# Altium PCB ip-mic-cat.PcbDoc (part 2 of 2)
Units mm, origin at the board's own origin, x right, y up, seen from the top; angles counter-clockwise.
Board outline 152.4 x 101.6 mm, 2 copper layers (Top Layer, Bottom Layer); 79 components, 63 nets, 296 pads, 99 vias.
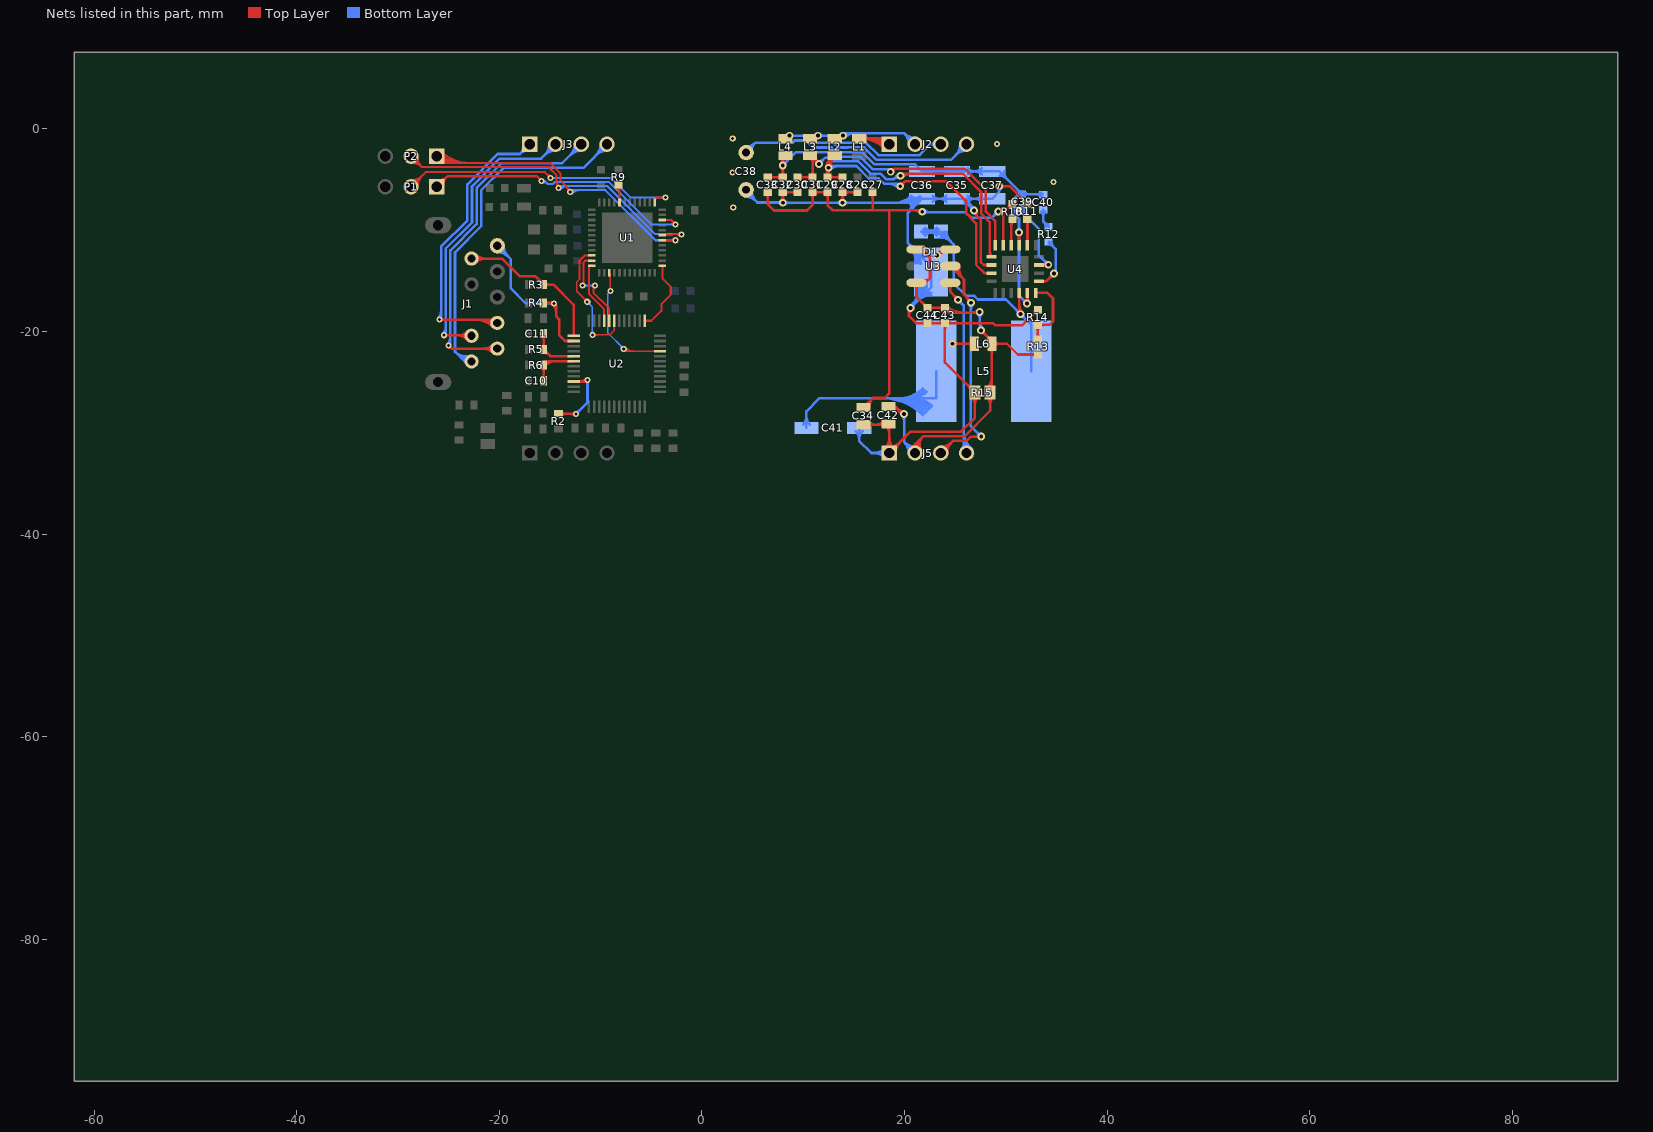
[diagram p2: the nets of this part, all layers, seen from the top]

## Via types
v1: diameter 0.6, hole 0.3, Top Layer to Bottom Layer, 70 vias
v2: diameter 0.762, hole 0.381, Top Layer to Bottom Layer, 29 vias

## Nets (pads, with @x,y where several pads share a name; then routed paths per layer and width w, separated by ;. In a path a pad name is that pad's centre, name@x,y a point inside that pad or via, vN(x,y) a via of type N, cw(c..) or ccw(c..) an arc to the next point about the centre after c; other vN are vias at no path point) (continued)
NetC26_2: C26.2 C28.2 C30.2 C32.2 C34.2 C35.2 C36.2 C37.2 C38.1 C41.1 C42.2 C43.2 C44.2 D1.2 J5.1 R11.2 R14.1 R15.1 U3.6 U4.12 | length 199.5
  Top Layer w0.254: C32.2@7.801,-6.435 cw(c7.378,-6.858) 7.976,-6.858 cw(c8.575,-6.858) C32.2@8.152,-6.435 ; v2@7.815,-7.108 ccw(c7.425,-6.718) 7.976,-6.718 ; C32.2@7.976,-6.63 ccw(c8.651,-6.63) v2@8.174,-7.108 ; v2(7.994,-7.287) 7.976,-7.269 C32.2@7.976,-6.259 C30.2@9.457,-6.259 ; C32.2@8.177,-6.435 cw(c8.6,-6.858) 8.6,-6.259 cw(c8.6,-5.66) C32.2@8.177,-6.084 ; C30.2@9.256,-6.435 ccw(c8.833,-6.858) 8.833,-6.259 ccw(c8.833,-5.66) C30.2@9.256,-6.084 ; v2@13.708,-7.108 ccw(c13.248,-6.648) 13.898,-6.648 ; C28.2@13.723,-6.435 cw(c13.299,-6.858) 13.898,-6.858 cw(c14.497,-6.858) C28.2@14.073,-6.435 ; v2(13.887,-7.287) 13.898,-7.276 C28.2@13.898,-6.259 C26.2@15.379,-6.259 ; 13.898,-6.7 ccw(c14.474,-6.7) v2@14.067,-7.108 ; C28.2@14.098,-6.435 cw(c14.522,-6.858) 14.522,-6.259 cw(c14.522,-5.66) C28.2@14.098,-6.084 ; C26.2@15.178,-6.435 ccw(c14.755,-6.858) 14.755,-6.259 ccw(c14.755,-5.66) C26.2@15.178,-6.084 ; C34.2@15.945,-29.194 18.332,-29.194 C42.2@18.408,-29.118 18.51,-29.219 J5.1@18.51,-32 20.617,-29.893 25.597,-29.893 26.955,-28.535 R15.1@26.955,-26.035 23.996,-23.077 C43.2@23.996,-19.165 ; C34.2@16.423,-29.422 cw(c16.974,-29.974) 16.974,-29.194 cw(c16.974,-28.414) C34.2@16.423,-28.965 ; 17.195,-29.194 ccw(c17.195,-28.154) C42.2@17.93,-28.889 ; 17.563,-29.194 cw(c17.563,-29.713) C42.2@17.93,-29.346 ; J5.1@18.061,-31.551 ccw(c16.977,-30.467) 18.51,-30.467 ccw(c20.043,-30.467) J5.1@18.959,-31.551 ; C42.2@18.18,-29.346 cw(c17.383,-30.143) 18.51,-30.143 ; J5.1@18.241,-31.731 ccw(c17.59,-31.08) 18.51,-31.08 ccw(c19.43,-31.08) J5.1@18.779,-31.731 ; J5.1@18.51,-31.619 ccw(c18.51,-30.699) 19.16,-31.35 ccw(c19.811,-32) J5.1@18.891,-32 ; J5.1@18.51,-31.365 ccw(c18.51,-29.832) 19.594,-30.916 ccw(c20.678,-32) J5.1@19.145,-32 ; 18.51,-29.652 cw(c18.943,-29.652) C42.2@18.637,-29.346 ; 20.44,-18.478 cw(c21.181,-18.478) v2@20.743,-17.881 ; v2(20.593,-17.676) 20.44,-17.828 20.44,-18.463 21.142,-19.165 C44.2@22.269,-19.165 C43.2@23.996,-19.165 ; C44.2@22.069,-19.34 ccw(c21.645,-19.764) 21.645,-19.165 ccw(c21.645,-18.566) C44.2@22.069,-18.99 ; C44.2@22.47,-19.34 cw(c22.893,-19.764) 22.893,-19.165 cw(c22.893,-18.566) C44.2@22.47,-18.99 ; v2@23.186,-12.241 ccw(c23.13,-11.621) U3.6@23.669,-11.933 ; v2(23.209,-12.494) 23.817,-11.886 U3.6@24.522,-11.886 ; v2@23.209,-12.24 ccw(c23.209,-11.627) 23.643,-12.061 ccw(c24.076,-12.494) v2@23.463,-12.494 ; v2@23.264,-12.246 ccw(c23.324,-11.977) 23.564,-12.115 ; v2@23.275,-12.249 ccw(c23.411,-11.739) U3.6@23.675,-12.196 ; v2@23.277,-12.426 cw(c23.922,-13.071) U3.6@23.922,-12.159 ; v2@23.46,-12.532 cw(c23.942,-12.605) U3.6@23.698,-12.183 ; 23.53,-12.173 ccw(c23.242,-11.886) U3.6@23.649,-11.886 ; C43.2@23.796,-19.34 ccw(c23.373,-19.764) 23.373,-19.165 ccw(c23.373,-18.566) C43.2@23.796,-18.99 ; C43.2@23.821,-19.34 cw(c23.398,-19.764) 23.996,-19.764 cw(c24.595,-19.764) C43.2@24.172,-19.34 ; C43.2@24.197,-19.34 cw(c24.62,-19.764) 24.62,-19.165 cw(c24.62,-18.566) C43.2@24.197,-18.99 ; 25.977,-25.057 ccw(c26.955,-24.079) R15.1@26.955,-25.462 ; 26.339,-25.419 cw(c25.873,-25.885) R15.1@26.532,-25.885 ; R15.1@26.41,-25.49 ccw(c26.955,-24.946) R15.1@26.955,-25.716 ; R15.1@26.656,-26.484 cw(c25.934,-27.206) 26.955,-27.206 cw(c27.976,-27.206) R15.1@27.254,-26.484 ; v2@26.844,-8.302 cw(c26.817,-8.605) 27.121,-8.605 ; v2(26.867,-8.049) 26.994,-8.049 27.121,-8.176 27.121,-8.543 27.527,-8.949 27.527,-13.132 27.827,-13.432 U4.12@28.595,-13.432 ; v2(29.356,-5.662) 30.399,-5.662 R11.2@32.124,-7.387 ; v2@29.535,-5.841 cw(c29.969,-6.275) 29.969,-5.662 cw(c29.969,-5.048) v2@29.535,-5.482 ; 31.658,-6.921 cw(c31.192,-7.387) R11.2@31.851,-7.387 ; 31.719,-6.982 ccw(c32.099,-6.601) R11.2@32.099,-7.139 ; 32.7,-18.32 ccw(c32.234,-17.854) R14.1@32.893,-17.854 ; 32.76,-18.259 cw(c33.141,-18.64) R14.1@33.141,-18.102 ; R14.1@33.166,-17.854 31.642,-19.378 28.949,-19.378 28.737,-19.165 C43.2@23.996,-19.165
  Bottom Layer w0.254: C38.1@4.261,-6.68 cw(c4.261,-8.213) 5.345,-7.129 cw(c6.429,-6.045) C38.1@4.896,-6.045 ; C38.1@4.261,-6.426 cw(c4.261,-7.346) 4.911,-6.696 cw(c5.561,-6.045) C38.1@4.642,-6.045 ; C38.1@4.261,-6.045 5.477,-7.262 v2@7.994,-7.262 ; 7.32,-7.262 cw(c7.32,-7.962) v2@7.815,-7.467 ; 7.443,-7.262 ccw(c7.443,-6.735) v2@7.815,-7.108 ; v2(7.994,-7.287) v2(13.887,-7.287) C36.2@21.336,-7.287 ; v2@8.174,-7.467 cw(c8.608,-7.9) 8.608,-7.287 cw(c8.608,-6.674) v2@8.174,-7.108 ; v2@13.708,-7.467 ccw(c13.274,-7.9) 13.274,-7.287 ccw(c13.274,-6.674) v2@13.708,-7.108 ; v2@14.067,-7.467 cw(c14.5,-7.9) 14.5,-7.287 cw(c14.5,-6.674) v2@14.067,-7.108 ; C41.1@15.188,-29.849 cw(c14.38,-30.657) 15.522,-30.657 cw(c16.664,-30.657) C41.1@15.856,-29.849 ; C41.1@15.522,-29.515 15.522,-30.791 16.731,-32 J5.1@18.51,-32 ; J5.1@18.061,-32.449 ccw(c16.977,-33.533) 16.977,-32 ccw(c16.977,-30.467) J5.1@18.061,-31.551 ; J5.1@18.241,-32.269 ccw(c17.59,-32.92) 17.59,-32 ccw(c17.59,-31.08) J5.1@18.241,-31.731 ; 18.999,-7.287 ccw(c18.999,-4.9) C36.2@20.687,-6.588 ; 19.612,-7.287 ccw(c19.612,-5.514) C36.2@20.866,-6.768 ; 20.225,-7.287 ccw(c20.225,-6.127) C36.2@21.046,-6.947 ; v2@20.527,-17.43 ccw(c20.368,-16.838) 20.899,-17.145 ccw(c21.43,-17.451) v2@20.838,-17.61 ; v2@20.539,-17.428 ccw(c20.344,-16.534) 21.113,-17.028 ; v2@20.593,-17.422 ccw(c20.593,-16.809) 21.026,-17.242 ccw(c21.46,-17.676) v2@20.847,-17.676 ; C36.2@20.593,-7.044 cw(c19.526,-7.472) 20.339,-8.284 ; 20.611,-8.012 ccw(c19.915,-7.316) C36.2@20.829,-6.95 ; 20.669,-11.605 ccw(c21.968,-10.307) D1.2@22.352,-12.102 ; 20.731,-11.667 cw(c19.273,-13.125) D1.2@21.329,-13.277 ; v2@20.841,-17.622 cw(c21.146,-17.555) 20.883,-17.387 ; 20.883,-7.74 ccw(c20.304,-7.16) C36.2@21.065,-6.856 ; 20.886,-17.383 ccw(c19.421,-15.918) D1.2@21.39,-15.276 ; D1.2@20.999,-11.935 ccw(c22.084,-10.85) D1.2@22.406,-12.351 ; D1.2@21.076,-13.258 ccw(c18.543,-13.071) 20.339,-11.275 ; D1.2@21.123,-12.059 cw(c20.003,-13.179) D1.2@21.583,-13.296 ; D1.2@21.148,-15.354 cw(c18.98,-16.062) v2(20.593,-17.676) 22.625,-15.644 D1.2@22.625,-14.122 22.625,-13.561 20.339,-11.275 ; 21.156,-7.467 ccw(c20.693,-7.004) C36.2@21.301,-6.761 ; 21.178,-17.09 ccw(c19.862,-15.774) D1.2@21.631,-15.197 ; 21.291,-16.978 cw(c22.625,-18.312) D1.2@22.625,-16.425 ; D1.2@21.329,-12.265 ccw(c22.201,-11.394) D1.2@22.459,-12.599 ; C36.2@21.428,-7.195 ccw(c21.082,-6.849) C36.2@21.536,-6.667 ; 21.471,-16.798 ccw(c20.303,-15.63) D1.2@21.873,-15.118 ; D1.2@21.724,-16.544 cw(c22.625,-17.445) D1.2@22.625,-16.171 ; D1.2@21.763,-16.505 ccw(c20.744,-15.486) D1.2@22.114,-15.039 ; D1.2@22.299,-11.854 cw(c21.851,-9.763) 20.339,-11.275 ; C36.2@22.785,-7.186 cw(c23.507,-7.908) 23.507,-6.887 cw(c23.507,-5.866) C36.2@22.785,-6.588 ; C35.2@24.141,-7.186 ccw(c23.419,-7.908) 23.419,-6.887 ccw(c23.419,-5.866) C35.2@24.141,-6.588 ; C35.2@25.94,-7.31 cw(c25.94,-7.763) 26.26,-7.443 ; C35.2@26.109,-6.887 ccw(c27.086,-6.887) 26.395,-7.578 ; C35.2@26.239,-7.186 cw(c26.961,-7.908) 26.961,-6.887 cw(c26.961,-5.866) C35.2@26.239,-6.588 ; C35.2@26.363,-6.887 ccw(c27.953,-6.887) v2@26.829,-8.011 ; 26.531,-7.496 ccw(c27.103,-7.166) v2@26.932,-7.804 ; 26.565,-7.554 cw(c26.074,-7.837) v2@26.621,-7.983 ; v2@26.613,-8.049 ccw(c25.999,-8.049) 26.433,-7.616 ccw(c26.867,-7.182) v2@26.867,-7.795 ; v2(26.867,-8.049) C35.2@25.705,-6.887 ; C37.2@27.621,-7.186 ccw(c26.899,-7.908) 26.899,-6.887 ccw(c26.899,-5.866) C37.2@27.621,-6.588 ; v2@29.194,-5.857 cw(c28.909,-6.201) 29.356,-6.201 ; v2(29.356,-5.662) 29.356,-6.201 ; v2@29.518,-5.857 ccw(c29.802,-6.201) 29.356,-6.201 ; 20.339,-11.275 20.339,-8.284 ; 20.339,-8.284 C36.2@21.336,-7.287 ; C36.2@21.336,-7.287 C36.2@21.736,-6.887 C35.2@25.19,-6.887 C35.2@25.705,-6.887 ; C35.2@25.705,-6.887 C37.2@28.67,-6.887 29.356,-6.201
NetC27_1: C27.1 C29.1 C31.1 C33.1 C34.1 R10.2 U4.9 | length 67.4
  Top Layer w0.254: C33.1@6.32,-6.435 cw(c5.897,-6.858) 6.496,-6.858 cw(c7.095,-6.858) C33.1@6.671,-6.435 ; C33.1@6.496,-6.259 6.496,-7.414 7.131,-8.049 10.382,-8.049 10.937,-7.494 C31.1@10.937,-6.259 C29.1@12.418,-6.259 12.418,-7.57 12.871,-8.024 16.834,-8.024 ; C31.1@10.762,-6.435 cw(c10.338,-6.858) 10.937,-6.858 cw(c11.536,-6.858) C31.1@11.113,-6.435 ; C31.1@11.138,-6.435 cw(c11.561,-6.858) 11.561,-6.259 cw(c11.561,-5.66) C31.1@11.138,-6.084 ; C29.1@12.217,-6.435 ccw(c11.794,-6.858) 11.794,-6.259 ccw(c11.794,-5.66) C29.1@12.217,-6.084 ; C29.1@12.242,-6.435 cw(c11.819,-6.858) 12.418,-6.858 cw(c13.016,-6.858) C29.1@12.593,-6.435 ; C34.1@15.945,-27.494 16.873,-26.566 ; C34.1@16.264,-27.491 cw(c16.951,-27.461) 16.464,-26.974 ; C34.1@16.517,-27.48 cw(c17.733,-27.426) 16.873,-26.566 ; C27.1@16.684,-6.435 cw(c16.26,-6.858) 16.859,-6.858 cw(c17.458,-6.858) C27.1@17.034,-6.435 ; C27.1@16.859,-6.259 16.859,-7.998 16.834,-8.024 ; 18.485,-8.049 18.485,-26.134 18.053,-26.566 16.873,-26.566 ; 20.78,-8.024 cw(c20.78,-9.157) v2@21.582,-8.356 ; 21.393,-8.024 cw(c21.393,-8.544) v2(21.761,-8.176) 21.609,-8.024 16.834,-8.024 ; v2(29.254,-8.151) 29.422,-8.319 29.745,-8.319 ; v2@29.505,-8.113 ccw(c29.745,-8.076) 29.745,-8.319 ; U4.9@29.745,-11.482 29.745,-8.319 ; 30.185,-7.879 ccw(c29.719,-7.413) R10.2@30.378,-7.413 ; 30.246,-7.818 cw(c30.626,-8.199) R10.2@30.626,-7.661 ; R10.2@30.651,-7.413 29.745,-8.319
  Bottom Layer w0.254: v2(21.761,-8.176) 21.812,-8.227 26.039,-8.227 26.572,-8.76 28.645,-8.76 v2(29.254,-8.151) ; v2@21.941,-8.356 cw(c22.252,-8.667) 22.252,-8.227 ; v2@21.941,-7.997 ccw(c22.497,-7.44) 22.497,-8.227 ; v2@29,-8.151 cw(c28.387,-8.151) 28.821,-8.584 cw(c29.254,-9.018) v2@29.254,-8.405
NetC28_1: C28.1 C29.2 L2.2 U4.13 | length 40.8
  Top Layer w0.254: C29.2@12.217,-4.584 ccw(c11.804,-4.17) v2@12.389,-4.17 ; v2@12.267,-3.886 cw(c12.904,-3.753) 12.444,-3.293 ; v2@12.295,-3.961 cw(c11.869,-4.207) 12.345,-4.334 ; C29.2@12.3,-4.5 cw(c13.01,-4.69) v2@12.642,-4.054 ; C29.2@12.389,-4.739 cw(c13.401,-4.739) v2@12.693,-4.016 ; v2@12.389,-4.151 ccw(c13.001,-4.151) C29.2@12.568,-4.584 ; L2.2@12.548,-2.719 cw(c11.94,-2.899) 12.389,-3.348 ; v2@12.576,-3.587 cw(c12.636,-3.348) 12.389,-3.348 ; C29.2@12.618,-4.935 cw(c13.041,-5.358) 13.041,-4.759 cw(c13.041,-4.16) C29.2@12.618,-4.584 ; v2@12.764,-3.782 cw(c14.004,-3.523) L2.2@13.108,-2.628 12.389,-3.348 ; L2.2@12.776,-2.96 ccw(c13.454,-3.638) v2(12.515,-3.834) v2(12.515,-3.834) v2@12.389,-3.833 ; C28.1@13.698,-4.935 ccw(c13.274,-5.358) 13.274,-4.759 ccw(c13.274,-4.16) C28.1@13.698,-4.584 ; C28.1@13.898,-4.759 C29.2@12.418,-4.759 12.389,-4.73 v2@12.389,-3.833 ; v2(19.577,-5.662) 20.085,-5.154 24.084,-5.154 26.105,-7.174 26.105,-8.354 27.07,-9.319 27.07,-13.409 27.893,-14.232 U4.13@28.595,-14.232 ; v2@19.577,-5.408 ccw(c19.577,-4.794) 20.01,-5.228 ccw(c20.444,-5.662) v2@19.831,-5.662 ; v2@12.389,-3.833 12.389,-3.348
  Bottom Layer w0.254: v2@12.695,-4.014 cw(c13.557,-4.876) 13.557,-3.656 ; 12.944,-3.656 ccw(c12.944,-4.263) v2(12.515,-3.834) 12.693,-3.656 15.251,-3.656 16.472,-4.877 17.46,-4.877 17.99,-5.407 19.322,-5.407 v2(19.577,-5.662) ccw(c18.963,-6.276) 18.963,-5.407 ; 18.349,-5.407 cw(c18.349,-6.889) v2@19.397,-5.841
NetC30_1: C30.1 C31.2 L3.2 U4.11 | length 40.7
  Top Layer w0.254: C30.1@9.457,-4.759 C31.2@10.937,-4.759 L3.2@10.937,-2.887 ; C30.1@9.657,-4.935 cw(c10.08,-5.358) 10.08,-4.759 cw(c10.08,-4.16) C30.1@9.657,-4.584 ; L3.2@10.678,-2.628 L3.2@10.937,-2.887 ; L3.2@10.7,-2.856 cw(c10.127,-3.429) 10.937,-3.429 ; C31.2@10.737,-4.935 ccw(c10.313,-5.358) 10.313,-4.759 ccw(c10.313,-4.16) C31.2@10.737,-4.584 ; C31.2@10.762,-4.584 ccw(c10.338,-4.16) 10.937,-4.16 ccw(c11.536,-4.16) C31.2@11.113,-4.584 ; 10.937,-3.386 cw(c11.687,-3.386) L3.2@11.157,-2.856 ; L3.2@10.997,-2.638 ccw(c11.525,-2.719) 11.147,-3.097 ; L3.2@11.034,-2.984 ccw(c11.55,-2.468) v2@11.55,-3.198 ; 11.151,-3.101 cw(c10.8,-3.452) v2@11.296,-3.452 ; L3.2@11.248,-2.677 ccw(c12.141,-2.813) v2@11.502,-3.452 ; L3.2@11.256,-3.026 ccw(c11.554,-2.854) v2@11.552,-3.198 ; L3.2@11.258,-3.029 cw(c10.851,-3.264) v2@11.305,-3.386 ; v2(11.55,-3.452) v2@11.502,-3.452 ; v2@19.782,-4.8 cw(c20.692,-5.71) 20.692,-4.423 ; 20.079,-4.423 ccw(c20.079,-5.097) v2(19.602,-4.62) 19.8,-4.423 25.794,-4.423 27.578,-6.206 27.578,-8.354 28.44,-9.216 28.44,-12.477 U4.11@28.595,-12.632 ; 28.44,-12.142 ccw(c29.085,-12.142) U4.11@28.629,-12.598 ; L3.2@10.937,-2.887 v2@11.502,-3.452
  Bottom Layer w0.254: v2(11.55,-3.452) 12.16,-2.842 12.529,-2.842 12.886,-3.199 15.44,-3.199 16.661,-4.42 17.649,-4.42 18.18,-4.95 18.932,-4.95 ; v2@11.55,-3.198 ccw(c11.55,-2.585) 11.984,-3.018 ccw(c12.418,-3.452) v2@11.804,-3.452 ; 19.188,-4.693 cw(c19.448,-4.953) v2(19.602,-4.62) 19.262,-4.62 18.932,-4.95 ; v2@19.495,-4.851 ccw(c19.285,-5.303) 18.932,-4.95
NetC32_1: C32.1 C33.2 L4.2 U4.10 | length 40.9
  Top Layer w0.254: C33.2@6.496,-4.759 C32.1@7.976,-4.759 v2(7.976,-3.604) 7.976,-2.9 L4.2@8.248,-2.628 ; C33.2@6.696,-4.935 cw(c7.12,-5.358) 7.12,-4.759 cw(c7.12,-4.16) C33.2@6.696,-4.584 ; L4.2@7.77,-2.856 cw(c7.272,-3.354) v2@7.976,-3.354 ; C32.1@7.776,-4.935 ccw(c7.353,-5.358) 7.353,-4.759 ccw(c7.353,-4.16) C32.1@7.776,-4.584 ; v2@7.797,-3.784 cw(c7.363,-4.217) 7.976,-4.217 cw(c8.589,-4.217) v2@8.156,-3.784 ; v2@7.797,-3.425 ccw(c7.363,-2.991) 7.976,-2.991 ccw(c8.589,-2.991) v2@8.156,-3.425 ; C32.1@7.801,-4.584 ccw(c7.378,-4.16) 7.976,-4.16 ccw(c8.575,-4.16) C32.1@8.152,-4.584 ; v2@7.815,-3.408 ccw(c7.633,-3.185) 7.911,-3.11 ; v2@7.851,-3.383 ccw(c7.621,-2.974) 8.074,-3.095 ccw(c8.413,-3.186) v2@8.16,-3.428 ; 7.92,-3.146 ccw(c8.299,-3.044) v2@8.103,-3.384 ; v2@7.976,-3.461 cw(c8.832,-3.461) L4.2@8.227,-2.856 ; v2(18.637,-4.239) 18.967,-3.909 ; v2@18.69,-3.991 ccw(c18.753,-3.695) 18.967,-3.909 ; v2@18.885,-4.186 cw(c19.181,-4.123) 18.967,-3.909 ; U4.10@28.945,-11.482 28.945,-9.075 28.035,-8.165 28.035,-6.017 25.927,-3.909 18.967,-3.909
  Bottom Layer w0.254: v2(7.976,-3.604) 9.295,-2.285 12.619,-2.285 13.076,-2.742 15.63,-2.742 16.85,-3.963 18.361,-3.963 v2(18.637,-4.239) ; v2@7.976,-3.35 ccw(c7.976,-2.737) 8.41,-3.171 ccw(c8.843,-3.604) v2@8.23,-3.604
NetC35_1: C35.1 C36.1 C37.1 C38.2 C39.2 C40.2 U4.7 U4.19 | length 66.4
  Top Layer w0.254: v2@31.132,-10.388 cw(c30.617,-10.903) 31.345,-10.903 ; v2(31.312,-10.208) 31.345,-10.242 U4.7@31.345,-11.482 ; 31.345,-10.74 cw(c31.844,-10.74) v2@31.491,-10.388 ; v2@31.919,-17.064 ccw(c31.374,-16.519) U4.19@32.145,-16.519 ; v2(32.099,-17.244) 32.145,-17.198 U4.19@32.145,-16.182 ; 32.145,-16.742 ccw(c32.601,-16.742) v2@32.279,-17.064
  Bottom Layer w0.254: C38.2@4.261,-2.362 5.251,-1.371 ; C38.2@4.286,-1.982 ccw(c4.334,-1.247) 4.855,-1.768 ccw(c5.376,-2.289) C38.2@4.641,-2.337 ; C38.2@4.302,-1.729 ccw(c4.383,-0.503) 5.251,-1.371 ; C38.2@4.894,-2.321 cw(c6.12,-2.24) 5.251,-1.371 ; C36.1@22.785,-4.486 cw(c23.507,-5.208) 23.507,-4.187 cw(c23.507,-3.166) C36.1@22.785,-3.888 ; C35.1@24.141,-4.486 ccw(c23.419,-5.208) 23.419,-4.187 ccw(c23.419,-3.166) C35.1@24.141,-3.888 ; C35.1@26.239,-4.486 cw(c26.961,-5.208) 26.961,-4.187 cw(c26.961,-3.166) C35.1@26.239,-3.888 ; C37.1@27.621,-4.486 ccw(c26.899,-5.208) 26.899,-4.187 ccw(c26.899,-3.166) C37.1@27.621,-3.888 ; C37.1@29.42,-4.61 cw(c29.42,-5.5) 30.049,-4.871 ; C37.1@29.843,-4.187 ccw(c30.996,-4.187) 30.181,-5.002 ; v2@31.132,-10.388 cw(c30.698,-10.821) 31.312,-10.821 cw(c31.925,-10.821) v2@31.491,-10.388 ; v2@31.132,-10.029 ccw(c30.698,-9.595) 31.312,-9.595 ccw(c31.925,-9.595) v2@31.491,-10.029 ; 31.15,-5.972 cw(c30.684,-6.438) C39.2@31.343,-6.438 ; 31.18,-6.532 cw(c31.468,-6.82) C39.2@31.593,-6.432 ; 31.211,-6.033 ccw(c31.591,-5.652) C39.2@31.591,-6.19 ; C39.2@31.515,-6.674 ccw(c31.325,-7.265) 30.886,-6.826 ; C39.2@31.817,-6.614 cw(c32.24,-7.037) 32.24,-6.438 cw(c32.24,-5.839) C39.2@31.817,-6.263 ; v2@31.845,-17.244 ccw(c31.232,-17.244) 31.665,-16.81 ccw(c32.099,-16.377) v2@32.099,-16.99 ; v2(32.099,-17.244) 31.312,-16.457 v2(31.312,-10.208) 31.312,-8.875 30.886,-8.45 30.886,-6.826 ; 32.953,-6.438 cw(c32.953,-7.21) C40.2@33.499,-6.664 ; 33.198,-6.438 ccw(c33.198,-6.013) C40.2@33.499,-6.314 ; C40.2@33.648,-6.438 C39.2@31.616,-6.438 ; 5.251,-1.371 8.949,-1.371 9.18,-1.14 10.277,-1.14 10.965,-1.828 12.808,-1.828 13.265,-2.285 15.819,-2.285 17.039,-3.506 21.055,-3.506 C36.1@21.736,-4.187 C35.1@25.19,-4.187 C37.1@28.67,-4.187 29.365,-4.187 C39.2@31.616,-6.438 ; 30.886,-6.826 31.274,-6.438 C39.2@31.616,-6.438
NetC39_1: C39.1 U4.3 | length 11
  Top Layer w0.254: U4.3@33.295,-13.432 34.184,-13.432 v2(34.207,-13.409) ; U4.3@33.537,-13.432 ccw(c33.537,-12.738) v2@34.028,-13.229 ; U4.3@33.651,-13.432 cw(c33.651,-13.965) v2@34.028,-13.588
  Bottom Layer w0.254: C39.1@31.616,-7.938 31.616,-8.227 33.242,-9.853 33.242,-12.443 v2(34.207,-13.409) ; C39.1@31.635,-7.938 ccw(c32.379,-7.938) 31.853,-8.464 ; C39.1@31.889,-7.938 ccw(c33.246,-7.938) 32.287,-8.897 ; v2@33.953,-13.409 ccw(c33.34,-13.409) 33.774,-12.975 ccw(c34.207,-12.541) v2@34.207,-13.155
NetC40_1: C40.1 R12.2 | length 3.8
  Bottom Layer w0.254: C40.1@33.524,-8.164 cw(c33.1,-8.588) 33.699,-8.588 cw(c34.298,-8.588) C40.1@33.875,-8.164 ; C40.1@33.699,-7.989 33.699,-9.117 R12.2@34.233,-9.651 ; 33.767,-9.185 cw(c33.301,-9.651) R12.2@33.96,-9.651 ; 33.827,-9.245 ccw(c34.208,-8.864) R12.2@34.208,-9.403
NetC41_2: C41.2 L5.2 L6.1 | length 49.9
  Top Layer w0.254: v2(24.758,-21.206) 24.761,-21.209 L6.1@26.931,-21.209 ; v2@24.938,-21.386 cw(c25.365,-21.813) 25.365,-21.209 ; v2@24.938,-21.027 ccw(c25.378,-20.587) 25.378,-21.209 ; L6.1@26.703,-21.437 ccw(c26.151,-21.989) 26.151,-21.209 ccw(c26.151,-20.429) L6.1@26.703,-20.981
  Bottom Layer w0.254: C41.2@9.988,-29.18 ccw(c9.18,-28.373) 10.322,-28.373 ccw(c11.464,-28.373) C41.2@10.656,-29.18 ; C41.2@10.322,-29.515 10.322,-27.896 11.631,-26.587 23.137,-26.587 L5.2@23.137,-23.932 ; 17.781,-26.587 cw(c17.781,-32.289) L5.2@21.813,-28.257 ; 18.394,-26.587 cw(c18.394,-31.676) L5.2@21.993,-28.077 ; 19.007,-26.587 cw(c19.007,-31.063) L5.2@22.172,-27.898 ; 19.45,-26.587 ccw(c19.45,-23.245) L5.2@21.813,-25.608 ; 19.62,-26.587 cw(c19.62,-30.449) L5.2@22.352,-27.718 ; 20.064,-26.587 ccw(c20.064,-23.859) L5.2@21.993,-25.788 ; 20.234,-26.587 cw(c20.234,-29.836) L5.2@22.531,-27.538 ; 20.677,-26.587 ccw(c20.677,-24.472) L5.2@22.172,-25.967 ; 20.847,-26.587 cw(c20.847,-29.223) L5.2@22.711,-27.359
NetC42_1: C42.1 C43.1 C44.1 J5.2 L6.2 R13.2 R15.2 U3.1 U3.3 | length 82.4
  Top Layer w0.254: C42.1@18.408,-27.418 19.108,-27.418 v2@19.831,-28.141 ; C42.1@18.666,-27.486 cw(c18.769,-28.451) 19.455,-27.765 ; C42.1@18.693,-27.739 cw(c18.842,-29.13) v2@19.831,-28.141 ; 19.262,-27.812 ccw(c19.677,-27.094) v2@19.892,-27.895 ; 19.307,-27.617 ccw(c19.958,-26.967) v2@19.958,-27.887 ; 19.528,-27.966 cw(c19.33,-28.309) v2@19.712,-28.206 ; 19.614,-27.924 cw(c19.397,-28.141) v2@19.704,-28.141 ; v2(19.958,-28.141) v2@19.831,-28.141 ; J5.2@20.862,-31.394 ccw(c20.782,-31.138) 21.05,-31.138 ; J5.2@20.937,-32.057 cw(c21.679,-31.684) 21.091,-31.096 ; U3.3@20.993,-15.379 cw(c20.527,-15.845) 21.186,-15.845 cw(c21.845,-15.845) U3.3@21.379,-15.379 ; J5.2@21.05,-32 21.05,-31.138 ; J5.2@21.163,-31.943 cw(c22.01,-31.518) 21.34,-30.848 ; U3.1@21.186,-11.886 21.811,-11.886 22.498,-12.573 22.498,-12.814 22.523,-12.839 22.523,-14.755 ; J5.2@21.238,-31.394 cw(c21.318,-31.138) 21.05,-31.138 ; J5.2@21.39,-31.829 cw(c22.341,-31.351) 21.589,-30.599 ; J5.2@21.617,-31.715 cw(c22.672,-31.185) 21.838,-30.35 ; U3.1@21.786,-12.159 cw(c21.786,-12.878) 22.294,-12.37 ; U3.3@21.791,-15.168 ccw(c21.913,-14.751) 22.22,-15.058 ; 21.803,-17.199 cw(c21.337,-17.665) C44.1@21.996,-17.665 ; U3.3@21.862,-14.924 ccw(c22.05,-14.282) 22.523,-14.755 ; 21.864,-17.259 ccw(c22.244,-16.879) C44.1@22.244,-17.417 ; U3.1@22.059,-11.886 ccw(c22.658,-11.886) 22.234,-12.31 ; C44.1@22.47,-17.84 cw(c22.893,-18.264) 22.893,-17.665 cw(c22.893,-17.066) C44.1@22.47,-17.49 ; C43.1@23.796,-17.84 ccw(c23.373,-18.264) 23.373,-17.665 ccw(c23.373,-17.066) C43.1@23.796,-17.49 ; C43.1@23.838,-17.849 ccw(c24.524,-17.163) 24.524,-18.133 ; C43.1@24.017,-17.669 ccw(c25.137,-16.55) 25.137,-18.133 ; C43.1@24.021,-17.913 cw(c24.021,-18.451) 24.402,-18.071 ; C43.1@24.197,-17.49 ccw(c25.75,-15.936) 25.75,-18.133 ; C43.1@24.269,-17.665 ccw(c24.928,-17.665) 24.462,-18.131 ; 26.69,-18.133 ccw(c26.69,-17.346) v2@27.246,-17.903 ; 26.935,-18.133 cw(c26.935,-18.573) v2@27.246,-18.262 ; v2@27.425,-18.133 24.464,-18.133 C43.1@23.996,-17.665 C44.1@22.269,-17.665 21.186,-16.582 U3.3@21.186,-15.186 22.092,-15.186 22.523,-14.755 ; v2@27.552,-20.14 cw(c27.552,-20.814) 28.029,-20.337 ; v2(27.552,-19.886) 27.578,-19.886 28.631,-20.939 L6.2@28.631,-21.209 ; v2@27.806,-19.886 ccw(c28.358,-19.886) 27.968,-20.276 ; 28.065,-20.373 cw(c27.479,-20.959) L6.2@28.308,-20.959 ; 28.114,-20.422 ccw(c28.631,-19.905) L6.2@28.631,-20.636 ; R15.2@28.156,-26.484 cw(c27.434,-27.206) 28.455,-27.206 cw(c29.476,-27.206) R15.2@28.754,-26.484 ; R15.2@28.156,-25.586 ccw(c27.008,-24.438) 28.631,-24.438 ; R15.2@28.335,-25.765 ccw(c27.621,-25.052) 28.631,-25.052 ; L6.2@28.403,-21.687 cw(c27.851,-22.239) 28.631,-22.239 cw(c29.411,-22.239) L6.2@28.859,-21.687 ; 28.631,-25.289 ccw(c29.051,-25.289) R15.2@28.754,-25.586 ; L6.2@28.859,-21.437 cw(c29.411,-21.989) 29.411,-21.209 cw(c29.411,-20.429) L6.2@28.859,-20.981 ; R13.2@32.991,-22.45 ccw(c32.567,-22.873) 32.567,-22.275 ccw(c32.567,-21.676) R13.2@32.991,-22.099 ; R13.2@33.191,-22.275 31.186,-22.275 30.12,-21.209 L6.2@28.631,-21.209 ; 21.05,-31.138 21.838,-30.35 ; 21.838,-30.35 25.93,-30.35 28.455,-27.825 R15.2@28.455,-26.035 28.631,-25.859 L6.2@28.631,-21.209
  Bottom Layer w0.254: v2@19.778,-28.32 cw(c19.345,-28.754) 19.958,-28.754 cw(c20.571,-28.754) v2@20.137,-28.32 ; v2(19.958,-28.141) 19.958,-30.908 J5.2@21.05,-32 ; J5.2@20.415,-32 ccw(c18.882,-32) 19.966,-30.916 ccw(c21.05,-29.832) J5.2@21.05,-31.365 ; J5.2@20.669,-32 ccw(c19.749,-32) 20.4,-31.35 ccw(c21.05,-30.699) J5.2@21.05,-31.619 ; v2@27.246,-18.262 cw(c26.812,-18.695) 27.425,-18.695 cw(c28.039,-18.695) v2@27.605,-18.262 ; 27.425,-18.966 ccw(c28.472,-18.966) v2@27.732,-19.706 ; v2(27.425,-18.082) 27.425,-19.759 v2(27.552,-19.886)
  other v1: 3.092,-7.744 34.715,-5.23 3.016,-4.29 29.153,-1.496 3.041,-0.963
NetD1_1: D1.1 L5.1 U4.18 | length 39.3
  Top Layer w0.254: 31.345,-17.385 ccw(c32.364,-17.385) v2@31.644,-18.106 ; U4.18@31.345,-16.182 31.345,-18.167 v2(31.464,-18.285)
  Bottom Layer w0.254: D1.1@21.64,-10.14 D1.1@23.319,-10.14 ; D1.1@21.862,-10.362 cw(c22.398,-10.898) 22.398,-10.14 cw(c22.398,-9.382) D1.1@21.862,-9.918 ; D1.1@22.041,-10.542 cw(c23.011,-11.512) 23.011,-10.14 cw(c23.011,-8.769) D1.1@22.041,-9.739 ; D1.1@22.114,-10.458 cw(c22.528,-10.732) 22.657,-10.252 ; D1.1@22.114,-9.822 ccw(c22.528,-9.548) 22.657,-10.028 ; D1.1@22.132,-10.419 cw(c22.847,-10.832) 22.633,-10.035 ; D1.1@22.132,-9.861 ccw(c22.847,-9.449) 22.633,-10.246 ; D1.1@23.208,-10.542 ccw(c22.239,-11.512) 22.239,-10.14 ccw(c22.239,-8.769) D1.1@23.208,-9.739 ; D1.1@23.388,-10.362 ccw(c22.852,-10.898) 22.852,-10.14 ccw(c22.852,-9.382) D1.1@23.388,-9.918 ; D1.1@23.61,-10.713 cw(c23.61,-12.097) 24.588,-11.119 ; D1.1@23.61,-10.459 cw(c23.61,-11.23) D1.1@24.154,-10.685 ; D1.1@23.61,-10.14 24.86,-11.391 24.86,-15.263 26.054,-16.457 26.856,-16.457 27.237,-16.838 30.016,-16.838 v2(31.464,-18.285) 32.537,-19.359 L5.1@32.537,-23.932 ; D1.1@23.924,-10.145 ccw(c24.67,-10.145) D1.1@24.142,-10.673 ; D1.1@24.178,-10.145 ccw(c25.537,-10.145) 24.576,-11.107 ; v2@31.21,-18.285 ccw(c30.597,-18.285) 31.03,-17.852 ccw(c31.464,-17.418) v2@31.464,-18.031 ; v2@31.464,-18.539 cw(c31.464,-19.153) 31.898,-18.719 cw(c32.331,-18.285) v2@31.718,-18.285 ; 32.026,-18.848 ccw(c32.537,-18.337) L5.1@32.537,-19.059
NetJ1_7: J1.7 J3.1 | length 37.4
  Top Layer w0.254: v1(-25.931,-18.819) -20.536,-18.819 J1.7@-20.205,-19.15 ; v1@-25.808,-18.941 cw(c-25.513,-19.236) -25.513,-18.819 cw(c-25.513,-18.401) v1@-25.808,-18.696 ; -22.388,-18.819 cw(c-22.388,-21.333) J1.7@-20.61,-19.555 ; -21.775,-18.819 cw(c-21.775,-20.72) J1.7@-20.431,-19.376 ; -21.161,-18.819 cw(c-21.161,-20.106) J1.7@-20.251,-19.196
  Bottom Layer w0.254: v1@-26.053,-18.696 ccw(c-26.779,-17.97) -25.752,-17.97 ; v1(-25.931,-18.819) -25.752,-18.64 -25.752,-11.619 -23.162,-9.028 -23.162,-5.472 -20.164,-2.474 -17.964,-2.474 ; J3.1@-17.623,-1.55 cw(c-18.795,-1.642) -17.964,-2.474 ; J3.1@-17.37,-1.53 cw(c-18.073,-1.585) -17.574,-2.084 cw(c-17.075,-2.583) J3.1@-17.02,-1.88 ; J3.1@-17.04,-2.133 ccw(c-17.132,-3.305) -17.964,-2.474 ; J3.1@-16.99,-1.5 -17.964,-2.474
NetJ1_8: J1.8 J3.2 | length 36.8
  Top Layer w0.254: v1(-25.474,-20.368) -22.797,-20.368 J1.8@-22.745,-20.42 ; v1@-25.351,-20.491 cw(c-25.056,-20.786) -25.056,-20.368 cw(c-25.056,-19.951) v1@-25.351,-20.246 ; -24.253,-20.368 cw(c-24.253,-21.928) J1.8@-23.15,-20.825 ; -24.003,-20.368 ccw(c-24.003,-19.162) J1.8@-23.15,-20.015 ; -23.64,-20.368 cw(c-23.64,-21.315) J1.8@-22.971,-20.646
  Bottom Layer w0.254: v1@-25.596,-20.246 ccw(c-26.321,-19.52) -25.295,-19.52 ; v1(-25.474,-20.368) -25.295,-20.19 -25.295,-11.808 -22.705,-9.217 -22.705,-5.661 -19.974,-2.931 -15.881,-2.931 J3.2@-14.45,-1.5 ; J3.2@-15.085,-1.5 cw(c-16.618,-1.5) -15.534,-2.584 cw(c-14.45,-3.668) J3.2@-14.45,-2.135 ; J3.2@-14.831,-1.5 cw(c-15.751,-1.5) -15.1,-2.15 cw(c-14.45,-2.801) J3.2@-14.45,-1.881
NetJ1_9: J1.9 J3.3 | length 42.5
  Top Layer w0.254: v1@-25.016,-21.557 cw(c-25.016,-21.975) -24.721,-21.68 cw(c-24.426,-21.384) v1@-24.843,-21.384 ; v1(-25.016,-21.384) -24.711,-21.69 J1.9@-20.205,-21.69 ; J1.9@-20.61,-22.095 ccw(c-21.588,-23.073) -21.588,-21.69 ccw(c-21.588,-20.307) J1.9@-20.61,-21.285 ; J1.9@-20.431,-21.916 ccw(c-20.975,-22.46) -20.975,-21.69 ccw(c-20.975,-20.92) J1.9@-20.431,-21.464
  Bottom Layer w0.254: v1@-25.139,-21.262 ccw(c-25.864,-20.537) -24.838,-20.537 ; v1(-25.016,-21.384) -24.838,-21.206 -24.838,-11.997 -22.248,-9.406 -22.248,-5.85 -19.785,-3.388 -13.798,-3.388 J3.3@-11.91,-1.5 ; J3.3@-12.545,-1.5 cw(c-14.078,-1.5) -12.994,-2.584 cw(c-11.91,-3.668) J3.3@-11.91,-2.135 ; J3.3@-12.291,-1.5 cw(c-13.211,-1.5) -12.56,-2.15 cw(c-11.91,-2.801) J3.3@-11.91,-1.881
NetJ1_10: J1.10 J3.4 | length 41.3
  Bottom Layer w0.254: -24.066,-22.31 ccw(c-23.145,-21.389) J1.10@-22.824,-22.651 ; -23.75,-22.625 ccw(c-23.017,-21.892) J1.10@-22.761,-22.897 ; J1.10@-22.886,-22.405 cw(c-23.273,-20.885) -24.381,-21.994 ; J1.10@-22.745,-22.96 -23.415,-22.96 -24.381,-21.994 ; J3.4@-10.005,-1.5 cw(c-11.538,-1.5) -10.454,-2.584 cw(c-9.37,-3.668) J3.4@-9.37,-2.135 ; J3.4@-9.751,-1.5 cw(c-10.671,-1.5) -10.02,-2.15 cw(c-9.37,-2.801) J3.4@-9.37,-1.881 ; J3.4@-9.37,-1.5 -11.715,-3.845 -19.596,-3.845 -21.791,-6.04 -21.791,-9.596 -24.381,-12.187 -24.381,-21.994
NetJ2_1: J2.1 L1.1 | length 12.3
  Top Layer w0.254: L1.1@16.017,-1.156 cw(c16.568,-1.708) 16.568,-0.928 cw(c16.568,-0.148) L1.1@16.017,-0.7 ; 16.244,-0.928 cw(c16.244,-3.718) J2.1@18.238,-1.766 ; 16.848,-0.928 cw(c16.848,-3.127) J2.1@18.419,-1.589 ; 17.452,-0.928 cw(c17.452,-2.536) J2.1@18.601,-1.411 ; J2.1@18.056,-1.944 ccw(c15.64,-4.309) 15.64,-0.928 17.938,-0.928 J2.1@18.51,-1.5
NetJ2_2: J2.2 L2.1 | length 15.3
  Top Layer w0.254: L2.1@13.108,-0.928 L2.1@13.401,-0.635 ; L2.1@13.73,-0.806 ccw(c13.401,-1.036) L2.1@13.401,-0.635 ; L2.1@13.755,-0.484 cw(c13.401,-0.145) L2.1@13.401,-0.635 ; v2(13.938,-0.66) 13.963,-0.635 L2.1@13.401,-0.635
  Bottom Layer w0.254: v2@14.118,-0.84 cw(c15.168,-1.89) 15.168,-0.405 ; 14.555,-0.405 ccw(c14.555,-1.277) v2(13.938,-0.66) 13.938,-0.405 19.955,-0.405 J2.2@21.05,-1.5 ; J2.2@20.415,-1.5 ccw(c18.882,-1.5) 19.966,-0.416 ccw(c21.05,0.668) J2.2@21.05,-0.865 ; J2.2@20.669,-1.5 ccw(c19.749,-1.5) 20.4,-0.85 ccw(c21.05,-0.199) J2.2@21.05,-1.119
NetJ2_3: J2.3 L3.1 | length 15.4
  Bottom Layer w0.254: v2(11.449,-0.66) 12.932,-0.66 13.643,-1.371 14.233,-1.371 14.235,-1.369 16.195,-1.369 17.418,-2.592 21.502,-2.592 22.594,-1.5 ; v2@11.628,-0.84 cw(c12.062,-1.274) 12.062,-0.66 cw(c12.062,-0.047) v2@11.628,-0.481 ; J2.3@23.014,-1.768 ccw(c22.594,-1.963) 22.594,-1.5 ; J2.3@23.014,-1.232 cw(c22.594,-1.037) 22.594,-1.5 ; J2.3@23.59,-1.5 22.594,-1.5
NetJ2_4: J2.4 L4.1 | length 24.2
  Top Layer w0.254: L4.1@8.319,-0.857 ccw(c8.123,-0.66) L4.1@8.401,-0.66 ; L4.1@8.536,-0.885 ccw(c8.421,-1.101) L4.1@8.248,-0.928 8.618,-0.559 8.655,-0.559 v2(8.655,-0.66)
  Bottom Layer w0.254: v2(8.655,-0.66) 10.443,-0.66 11.154,-1.371 12.997,-1.371 13.454,-1.828 14.422,-1.828 14.424,-1.826 16.006,-1.826 17.229,-3.049 24.581,-3.049 J2.4@26.13,-1.5 ; J2.4@25.495,-1.5 cw(c23.962,-1.5) 25.046,-2.584 cw(c26.13,-3.668) J2.4@26.13,-2.135 ; J2.4@25.749,-1.5 cw(c24.829,-1.5) 25.48,-2.15 cw(c26.13,-2.801) J2.4@26.13,-1.881
NetJ5_3: J5.3 U3.5 | length 33.5
  Top Layer w0.254: J5.3@23.59,-32 24.783,-30.807 26.119,-30.807 26.55,-30.376 v2(27.578,-30.376) ; J5.3@23.59,-31.619 ccw(c23.59,-30.699) 24.24,-31.35 ccw(c24.891,-32) J5.3@23.971,-32 ; J5.3@23.59,-31.365 ccw(c23.59,-29.832) 24.674,-30.916 ccw(c25.758,-32) J5.3@24.225,-32 ; U3.5@24.523,-13.536 25.876,-14.889 ; U3.5@24.889,-13.52 ccw(c25.64,-13.586) 25.107,-14.12 ; U3.5@25.142,-13.542 ccw(c26.347,-13.649) 25.491,-14.504 ; U3.5@25.395,-13.564 ccw(c27.054,-13.711) 25.876,-14.889 ; 26.02,-16.474 cw(c25.327,-17.168) v2@26.308,-17.168 ; v2(26.562,-17.168) 26.562,-17.015 25.876,-16.33 25.876,-14.889 ; v2@27.398,-30.555 ccw(c26.965,-30.989) 26.965,-30.376 ccw(c26.965,-29.763) v2@27.398,-30.196
  Bottom Layer w0.254: v2@26.382,-17.347 cw(c25.949,-17.781) 26.562,-17.781 cw(c27.175,-17.781) v2@26.741,-17.347 ; v2(26.562,-17.168) 26.562,-29.36 v2(27.578,-30.376) ; v2@27.324,-30.376 ccw(c26.711,-30.376) 27.144,-29.942 ccw(c27.578,-29.509) v2@27.578,-30.122
NetJ5_4: J5.4 U3.4 | length 25.3
  Top Layer w0.254: U3.4@24.33,-15.379 cw(c23.864,-15.845) 24.523,-15.845 cw(c25.182,-15.845) U3.4@24.716,-15.379 ; U3.4@24.523,-15.186 24.523,-16.094 v2(25.292,-16.863) ; v2@25.038,-16.863 ccw(c24.425,-16.863) 24.858,-16.429 ccw(c25.292,-15.996) v2@25.292,-16.609
  Bottom Layer w0.254: v2@25.292,-17.117 cw(c25.292,-17.73) 25.725,-17.297 cw(c26.159,-16.863) v2@25.546,-16.863 ; v2(25.292,-16.863) 25.851,-17.422 25.851,-31.721 J5.4@26.13,-32 ; J5.4@25.681,-31.551 ccw(c25.272,-31.142) 25.851,-31.142 ; 25.851,-31.019 ccw(c27.111,-31.019) J5.4@26.22,-31.91 ; 25.851,-30.406 ccw(c27.724,-30.406) J5.4@26.399,-31.731 ; 25.851,-29.792 ccw(c28.338,-29.792) J5.4@26.579,-31.551
NetP2_1: P2.1 U1.30 | length 45.4
  Top Layer w0.203: P2.1@-26.436,-2.941 ccw(c-25.449,-1.954) P2.1@-25.449,-3.35 ; P2.1@-26.293,-2.798 ccw(c-24.958,-1.463) -24.958,-3.35 ; P2.1@-26.185,-2.69 -25.524,-3.35 -15.002,-3.35 -13.947,-4.405 -13.947,-5.103 -13.001,-6.049 v1(-13.001,-6.24) ; P2.1@-26.149,-2.654 ccw(c-24.468,-0.973) -24.468,-3.35 ; P2.1@-26.005,-2.51 ccw(c-23.977,-0.482) -23.977,-3.35 ; P2.1@-25.862,-2.367 ccw(c-23.487,0.008) -23.487,-3.35 ; P2.1@-25.718,-2.223 ccw(c-22.996,0.499) -22.996,-3.35 ; -13.474,-5.576 cw(c-14.139,-6.24) v1@-13.199,-6.24 ; -13.127,-5.923 cw(c-13.445,-6.24) v1@-12.996,-6.24 ; U1.30@-3.914,-10.992 v1(-2.618,-10.992) ; v1@-2.758,-11.132 ccw(c-3.097,-11.471) -3.097,-10.992 ccw(c-3.097,-10.513) v1@-2.758,-10.851
  Bottom Layer w0.203: v1@-13.004,-6.237 cw(c-12.533,-6.708) -12.533,-6.042 ; v1(-13.001,-6.24) -13.033,-6.24 -12.835,-6.042 -9.529,-6.042 -4.579,-10.992 v1(-2.618,-10.992) ; v1@-12.86,-6.381 cw(c-12.043,-7.198) -12.043,-6.042 ; v1@-2.758,-11.132 ccw(c-3.097,-11.471) -3.097,-10.992 ccw(c-3.097,-10.513) v1@-2.758,-10.851
NetP2_2: P2.2 U1.31 | length 39.9
  Top Layer w0.203: P2.2@-28.725,-2.69 -27.658,-3.756 ; P2.2@-28.707,-3.147 cw(c-28.668,-4.11) -27.986,-3.428 cw(c-27.305,-2.747) P2.2@-28.268,-2.708 ; P2.2@-28.698,-3.35 cw(c-28.643,-4.741) -27.658,-3.756 ; P2.2@-28.065,-2.716 ccw(c-26.674,-2.772) -27.658,-3.756 ; v1@-14.313,-5.734 ccw(c-14.557,-5.581) -14.353,-5.377 ; v1(-14.145,-5.839) -14.145,-5.585 -14.353,-5.377 ; U1.31@-3.914,-10.492 -2.973,-10.492 -2.868,-10.387 -2.054,-10.387 v1(-2.029,-10.411) ; -2.567,-10.387 cw(c-2.567,-10.949) v1@-2.17,-10.552 ; -2.449,-10.387 ccw(c-2.449,-9.991) v1@-2.17,-10.271 ; -27.658,-3.756 -15.17,-3.756 -14.353,-4.573 -14.353,-5.377
  Bottom Layer w0.203: v1@-14.149,-5.836 cw(c-13.665,-6.319) -13.665,-5.636 ; v1(-14.145,-5.839) -14.145,-5.738 -14.043,-5.636 -9.36,-5.636 -4.609,-10.387 -2.054,-10.387 v1(-2.029,-10.411) ; v1@-14.005,-5.98 cw(c-13.175,-6.81) -13.175,-5.636 ; -2.567,-10.387 cw(c-2.567,-10.949) v1@-2.17,-10.552 ; -2.449,-10.387 ccw(c-2.449,-9.991) v1@-2.17,-10.271
NetR2_2: R2.2 U2.10 | length 10.5
  Top Layer w0.254: R2.2@-14.145,-28.102 -14.106,-28.141 v1(-12.443,-28.141) ; R2.2@-13.888,-28.259 cw(c-13.601,-28.546) -13.601,-28.141 ; R2.2@-13.888,-27.944 ccw(c-13.413,-27.47) -13.413,-28.141 ; U2.10@-12.655,-24.938 -11.45,-24.938 v1(-11.3,-24.788) ; v1@-12.566,-28.263 ccw(c-12.861,-28.558) -12.861,-28.141 ccw(c-12.861,-27.723) v1@-12.566,-28.018 ; U2.10@-12.08,-24.938 ccw(c-12.08,-24.008) v1@-11.423,-24.665
  Bottom Layer w0.254: v1(-12.443,-28.141) -11.3,-26.998 v1(-11.3,-24.788) ; v1@-12.443,-27.968 ccw(c-12.443,-27.55) -12.148,-27.845 ccw(c-11.853,-28.141) v1@-12.27,-28.141 ; v1@-11.423,-24.91 cw(c-11.718,-25.205) -11.3,-25.205 cw(c-10.883,-25.205) v1@-11.178,-24.91
NetR9_2: R9.2 U1.44 | length 2.8
  Top Layer w0.203: R9.2@-8.395,-5.716 cw(c-9.015,-6.335) -8.139,-6.335 ; R9.2@-8.227,-5.523 -8.139,-5.611 U1.44@-8.139,-7.267 ; -8.139,-6.03 cw(c-7.695,-6.03) R9.2@-8.009,-5.716
NetR10_1: R10.1 U4.8 | length 3.6
  Top Layer w0.254: R10.1@30.451,-9.088 cw(c30.223,-9.316) 30.545,-9.316 ; U4.8@30.545,-11.482 30.545,-9.019 R10.1@30.651,-8.913 ; 30.545,-9.707 cw(c31.42,-9.707) R10.1@30.802,-9.088
NetR11_1: R11.1 U4.6 | length 3.5
  Top Layer w0.254: R11.1@31.974,-9.063 cw(c31.561,-9.476) 32.145,-9.476 ; R11.1@32.124,-8.887 32.145,-8.908 U4.6@32.145,-11.482 ; 32.145,-9.496 cw(c32.758,-9.496) R11.1@32.325,-9.063
NetR12_1: R12.1 U4.1 | length 7.2
  Top Layer w0.254: U4.1@33.295,-15.032 34.009,-15.032 v2(34.766,-14.275) ; v2@34.512,-14.275 cw(c33.899,-14.275) 34.332,-14.708 cw(c34.766,-15.142) v2@34.766,-14.529
  Bottom Layer w0.254: R12.1@34.233,-11.151 34.918,-11.836 34.918,-14.123 v2(34.766,-14.275) ; R12.1@34.258,-11.399 cw(c34.258,-11.937) 34.638,-11.556 ; R12.1@34.506,-11.151 ccw(c35.165,-11.151) 34.699,-11.617
NetR13_1: R13.1 R14.2 U4.20 | length 10.1
  Top Layer w0.254: U4.20@32.945,-16.182 34.111,-16.182 34.664,-16.736 34.664,-18.997 34.307,-19.354 R14.2@33.166,-19.354 33.166,-20.749 R13.1@33.191,-20.775 ; R13.1@32.991,-20.599 ccw(c32.568,-20.177) 33.166,-20.177 ; R14.2@32.99,-19.529 cw(c32.567,-19.952) 33.166,-19.952 cw(c33.765,-19.952) R14.2@33.341,-19.529 ; 33.166,-20.175 ccw(c33.766,-20.175) R13.1@33.342,-20.599 ; R14.2@33.366,-19.529 cw(c33.79,-19.952) 33.79,-19.354 cw(c33.79,-18.755) R14.2@33.366,-19.178
PMOD0: U1.12 U2.45 | length 6.6
  Top Layer w0.203: -11.167,-13.676 cw(c-10.93,-13.676) U1.12@-11.097,-13.508 ; U1.12@-10.864,-13.492 -11.167,-13.492 -11.167,-16.285 -9.655,-17.797 U2.45@-9.655,-18.938
PMOD1: U1.11 U2.44 | length 10.3
  Top Layer w0.203: v1(-11.783,-15.466) -11.681,-15.364 -11.681,-13.18 -11.493,-12.992 U1.11@-10.864,-12.992 ; v1(-10.538,-15.466) -10.716,-15.466 -10.716,-16.161 -9.155,-17.723 U2.44@-9.155,-18.938
  Bottom Layer w0.203: v1(-11.783,-15.466) v1(-10.538,-15.466) ; v1@-11.643,-15.606 cw(c-11.304,-15.945) -11.304,-15.466 cw(c-11.304,-14.987) v1@-11.643,-15.326 ; v1@-10.679,-15.606 ccw(c-11.017,-15.945) -11.017,-15.466 ccw(c-11.017,-14.987) v1@-10.679,-15.326
PMOD2: U1.10 U2.43 | length 16.2
  Top Layer w0.152: -12.088,-14.837 -12.362,-15.112 -12.362,-16.03 v1(-11.326,-17.066) ; v1@-11.55,-17.066 ccw(c-12.09,-17.066) -11.708,-16.684 ccw(c-11.326,-16.302) v1@-11.326,-16.842 ; v1(-10.818,-20.343) -9.091,-20.343 -8.655,-19.907 U2.43@-8.655,-18.938 ; v1@-10.66,-20.501 cw(c-10.278,-20.883) -10.278,-20.343 cw(c-10.278,-19.803) v1@-10.66,-20.185
  Top Layer w0.203: -12.088,-14.837 -12.088,-13.012 -11.567,-12.492 U1.10@-10.864,-12.492
  Bottom Layer w0.152: v1@-11.326,-17.29 cw(c-11.326,-17.83) -10.944,-17.448 cw(c-10.562,-17.066) v1@-11.102,-17.066 ; v1(-11.326,-17.066) -10.818,-17.574 v1(-10.818,-20.343) ; v1@-10.976,-20.185 ccw(c-11.358,-19.803) -10.818,-19.803 ccw(c-10.278,-19.803) v1@-10.66,-20.185
RD+: C10.2 R6.2 U2.6 | length 8.8
  Top Layer w0.254: C10.2@-15.788,-24.606 ccw(c-16.169,-24.226) -15.63,-24.226 ccw(c-15.092,-24.226) C10.2@-15.473,-24.606 ; R6.2@-15.788,-23.572 cw(c-16.169,-23.953) -15.63,-23.953 cw(c-15.092,-23.953) R6.2@-15.473,-23.572 ; R6.2@-15.652,-23.193 cw(c-15.037,-23.808) -15.037,-22.938 ; C10.2@-15.63,-24.864 R6.2@-15.63,-23.315 -15.253,-22.938 ; R6.2@-15.555,-23.005 ccw(c-15.457,-22.734) -15.253,-22.938 ; R6.2@-15.473,-23.372 cw(c-14.423,-24.422) -14.423,-22.938 ; R6.2@-15.407,-23.215 cw(c-15.11,-23.215) R6.2@-15.32,-23.005 ; U2.6@-12.655,-22.938 -15.253,-22.938
RD-: C11.2 R5.2 U2.5 | length 7.3
  Top Layer w0.254: R5.2@-15.788,-21.508 ccw(c-16.169,-21.127) -15.63,-21.127 ccw(c-15.092,-21.127) R5.2@-15.473,-21.508 ; C11.2@-15.788,-20.473 cw(c-16.169,-20.854) -15.63,-20.854 cw(c-15.092,-20.854) C11.2@-15.473,-20.473 ; R5.2@-15.63,-22.088 cw(c-15.63,-22.868) -15.079,-22.317 ; C11.2@-15.63,-20.216 R5.2@-15.63,-21.765 -14.958,-22.438 U2.5@-12.655,-22.438 ; R5.2@-15.407,-21.865 ccw(c-15.11,-21.865) R5.2@-15.32,-22.075
RST: U1.25 U2.37 | length 7.2
  Top Layer w0.203: U2.37@-5.655,-18.938 -4.993,-18.938 -4.011,-17.955 -4.011,-17.295 -3.076,-16.36 -3.076,-15.588 -3.914,-14.75 U1.25@-3.914,-13.492
SCK: U1.15 U2.33 | length 15.6
  Top Layer w0.152: U1.15@-9.173,-14.501 cw(c-9.448,-14.776) -9.06,-14.776 ; U1.15@-9.139,-14.217 -9.06,-14.296 -9.06,-15.98 v1(-9.04,-15.999) ; v1@-7.776,-21.772 ccw(c-7.376,-21.371) -7.376,-21.938 ; v1(-7.719,-21.714) -7.496,-21.938 ; v1@-7.669,-21.664 ccw(c-7.008,-21.003) -7.008,-21.938 ; v1@-7.622,-21.916 cw(c-7.574,-22.016) -7.496,-21.938 ; v1@-7.561,-21.556 ccw(c-6.64,-20.635) -6.64,-21.938 ; v1@-7.517,-21.811 ccw(c-7.418,-21.859) -7.496,-21.938 ; U2.33@-4.155,-21.938 -7.496,-21.938
  Bottom Layer w0.152: v1(-9.04,-15.999) -9.283,-16.243 -9.283,-20.15 v1(-7.719,-21.714) ; v1@-7.943,-21.714 ccw(c-8.483,-21.714) -8.101,-21.332 ccw(c-7.719,-20.95) v1@-7.719,-21.491
SWCLK: P1.2 U1.37 | length 34.9
  Top Layer w0.203: P1.2@-28.725,-5.712 -27.277,-4.265 -15.517,-4.265 v1(-14.958,-4.823) ; P1.2@-28.725,-5.255 ccw(c-28.725,-4.151) -27.944,-4.932 ccw(c-27.164,-5.712) P1.2@-28.268,-5.712 ; P1.2@-28.725,-5.052 ccw(c-28.725,-3.458) -27.597,-4.585 ccw(c-26.47,-5.712) P1.2@-28.064,-5.712 ; v1@-15.156,-4.823 ccw(c-15.635,-4.823) -15.297,-4.485 ccw(c-14.958,-4.146) v1@-14.958,-4.625 ; U1.37@-4.639,-7.267 -4.639,-6.95 -4.442,-6.754 v1(-3.579,-6.754) ; U1.37@-4.615,-7.017 cw(c-4.399,-7.017) -4.552,-6.863 ; v1@-3.719,-6.894 ccw(c-4.058,-7.233) -4.058,-6.754 ccw(c-4.058,-6.275) v1@-3.719,-6.614
  Bottom Layer w0.203: v1(-14.958,-4.823) -8.989,-4.823 -7.059,-6.754 v1(-3.579,-6.754) ; v1@-3.719,-6.894 ccw(c-4.058,-7.233) -4.058,-6.754 ccw(c-4.058,-6.275) v1@-3.719,-6.614
SWDIO: P1.1 U1.34 | length 35
  Top Layer w0.203: P1.1@-26.185,-5.712 -25.143,-4.671 ; P1.1@-26.158,-5.256 ccw(c-26.106,-4.349) -25.464,-4.991 ccw(c-24.821,-5.634) P1.1@-25.728,-5.686 ; P1.1@-26.147,-5.053 ccw(c-26.071,-3.743) -25.143,-4.671 ; P1.1@-25.525,-5.674 cw(c-24.215,-5.599) -25.143,-4.671 ; v1@-16.02,-5.128 ccw(c-16.499,-5.128) -16.16,-4.79 ccw(c-15.822,-4.451) v1@-15.822,-4.93 ; v1(-15.822,-5.128) -16.279,-4.671 -25.143,-4.671 ; U1.34@-3.914,-8.992 -3.043,-8.992 v1(-2.614,-9.421) ; v1@-2.812,-9.421 ccw(c-3.291,-9.421) -2.952,-9.082 ccw(c-2.614,-8.743) v1@-2.614,-9.222
  Bottom Layer w0.203: v1@-15.823,-5.124 cw(c-15.69,-5.468) -15.429,-5.207 ; v1(-15.822,-5.128) -15.508,-5.128 ; v1@-15.75,-5.313 cw(c-15.567,-5.787) -15.208,-5.428 ; v1@-15.642,-5.213 cw(c-15.508,-5.276) -15.508,-5.128 ; v1@-15.642,-5.043 ccw(c-15.508,-4.98) -15.508,-5.128 ; v1@-2.754,-9.561 ccw(c-3.093,-9.9) -3.093,-9.421 ccw(c-3.093,-8.942) v1@-2.754,-9.281 ; v1(-2.614,-9.421) -5.001,-9.421 -9.192,-5.23 -14.509,-5.23 -14.708,-5.428 -15.208,-5.428 ; -15.508,-5.128 -15.208,-5.428
TD+: J1.1 R4.1 U2.2 | length 23.1
  Top Layer w0.254: R4.1@-15.63,-17.168 v1@-14.806,-17.168 ; R4.1@-15.473,-17.325 cw(c-15.092,-17.706) -15.092,-17.168 cw(c-15.092,-16.629) R4.1@-15.473,-17.01 ; -15.143,-17.168 cw(c-15.143,-17.759) -14.725,-17.341 cw(c-15.511,-18.127) -14.399,-18.127 ; v1@-14.617,-17.391 cw(c-14.637,-17.628) -14.399,-17.628 ; v1(-14.602,-17.219) -14.602,-17.371 -14.399,-17.574 ; v1@-14.545,-17.161 cw(c-14.898,-17.514) -14.399,-17.514 ; v1@-14.447,-17.294 ccw(c-14.225,-17.401) -14.399,-17.574 ; U2.2@-12.655,-20.938 -13.5,-20.938 -14.094,-20.343 -14.094,-18.793 -14.399,-18.488 -14.399,-17.574
  Bottom Layer w0.254: J1.1@-20.205,-12.153 cw(c-20.205,-13.657) -19.141,-12.594 cw(c-18.078,-11.53) J1.1@-19.582,-11.53 ; J1.1@-20.205,-11.899 cw(c-20.205,-12.79) -19.575,-12.16 cw(c-18.945,-11.53) J1.1@-19.836,-11.53 ; J1.1@-20.205,-11.53 -18.87,-12.865 -18.87,-15.745 -17.396,-17.219 v1(-14.602,-17.219) ; v1@-14.725,-17.341 ccw(c-15.02,-17.636) -15.02,-17.219 ccw(c-15.02,-16.801) v1@-14.725,-17.096
TD-: J1.2 R3.1 U2.1 | length 20.1
  Top Layer w0.254: J1.2@-22.745,-12.8 -19.732,-12.8 -18.006,-14.526 -16.469,-14.526 R3.1@-15.63,-15.364 -14.653,-15.364 -12.655,-17.363 U2.1@-12.655,-20.438 ; J1.2@-22.519,-13.026 cw(c-21.975,-13.57) -21.975,-12.8 cw(c-21.975,-12.03) J1.2@-22.519,-12.574 ; J1.2@-22.34,-13.205 cw(c-21.362,-14.183) -21.362,-12.8 cw(c-21.362,-11.417) J1.2@-22.34,-12.395 ; -16.182,-14.813 ccw(c-15.63,-14.262) R3.1@-15.63,-15.041 ; R3.1@-15.94,-15.054 cw(c-16.15,-15.264) R3.1@-15.853,-15.264 ; R3.1@-15.473,-15.522 cw(c-15.092,-15.903) -15.092,-15.364 cw(c-15.092,-14.826) R3.1@-15.473,-15.207
pads on no net: J1.11 J1.12 U1.1 U1.2 U1.8 U1.9 U1.13 U1.18 U1.19 U1.20 U1.27 U1.32 U1.33 U1.38 U1.39 U1.40 U1.41 U1.42 U1.43 U1.45 U1.46 U1.49 U2.7 U2.12 U2.13 U2.18 U2.23 U2.24 U2.25 U2.26 U2.27 U2.31 U2.38 U2.39 U2.40 U2.41 U2.42 U2.46 U2.47 U3.2 U4.0 U4.2 U4.4 U4.5 U4.15 U4.16 U4.17
copper on no net:
  other v1: -20.14,-23.899 -23.01,-17.6

## Polygon pours and split planes (outlines as drawn)
GND on Top Layer "Bottom Layer-No Net" (solid, remove dead copper, pour order 5): -33.5,0 0,0 0,-33.5 -33.5,-33.5 -33.5,0
NetC42_1 on Top Layer "Top Layer-No Net" (solid, remove dead copper, pour order 6): 2,0 35.5,0 35.5,-33.373 35.373,-33.5 2,-33.5 2,-25.756 17.4,-25.756 17.4,-8.738 2,-8.738 2,0
GND on Bottom Layer "Top Layer-No Net" (solid, remove dead copper, pour order 8): -33.5,0 0,0 0,-33.5 -33.5,-33.5 -33.5,0
NetC42_1 on Bottom Layer "Top Layer-No Net" (solid, remove dead copper, pour order 7): 2,0 35.5,0 35.5,-33.5 2,-33.5 2,-25.756 17.4,-25.756 17.4,-8.811 17.326,-8.738 2,-8.738 2,0

## Keep-outs
Keep-Out Layer:
  circle w0.1: c-2.5,-2.5 r2.6
  circle w0.1: c-31,-31 r2.6
  circle w0.1: c4.5,-31 r2.6
  circle w0.1: c33,-2.5 r2.6
  lines w0.15: -33.5,-33.5 0,-33.5 2,-33.5 35.5,-33.5 35.5,0 2,0 0,0 -33.5,0 -33.5,-33.5 ; 0,-27.94 2,-27.94 2,-25.756 17.4,-25.756 17.4,-8.738 2,-8.738 2,-5.512 0,-5.512 0,-27.94

## Silkscreen, mask and mechanical layers (free items; w line width, h text height)
Top Overlay:
  lines w0.15: 0,-33.5 0,-27.94 ; 2,-5.512 2,0
  text "T" at -26.464,-1.039 h1
  text "R" at -28.953,-1.064 h1
  text "C" at -28.979,-8.075 h1
  text "D" at -26.337,-8.1 h1